# Altium PCB TPS60400.PcbDoc
Units mm, origin at the board's own origin, x right, y up, seen from the top; angles counter-clockwise.
Board outline 25.4 x 25.4 mm, 2 copper layers (Top Layer, Bottom Layer); 20 components, 12 nets, 61 pads, 12 vias.
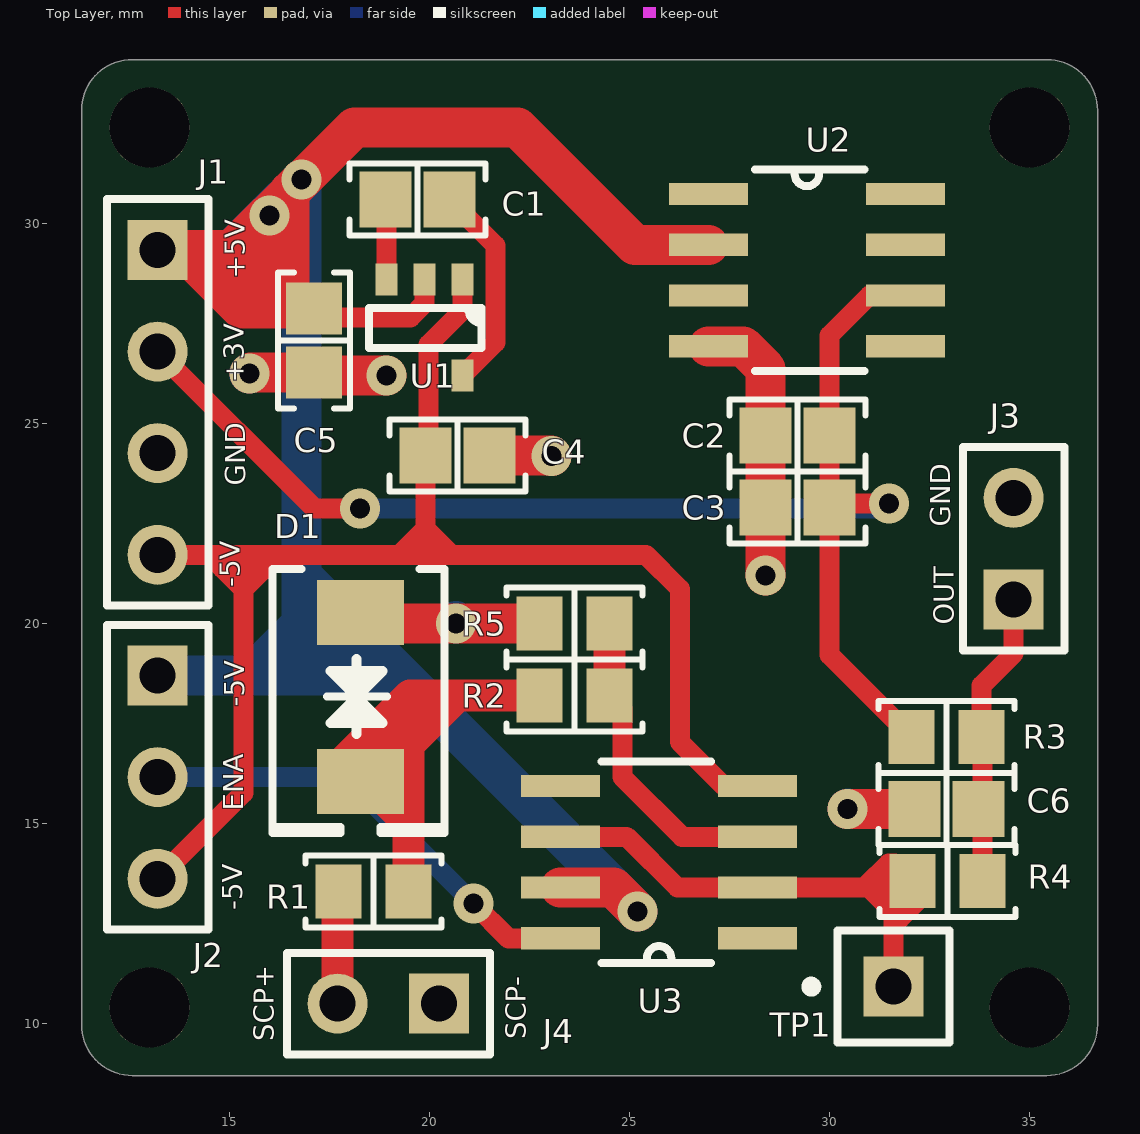
[diagram p0: Top Layer view]
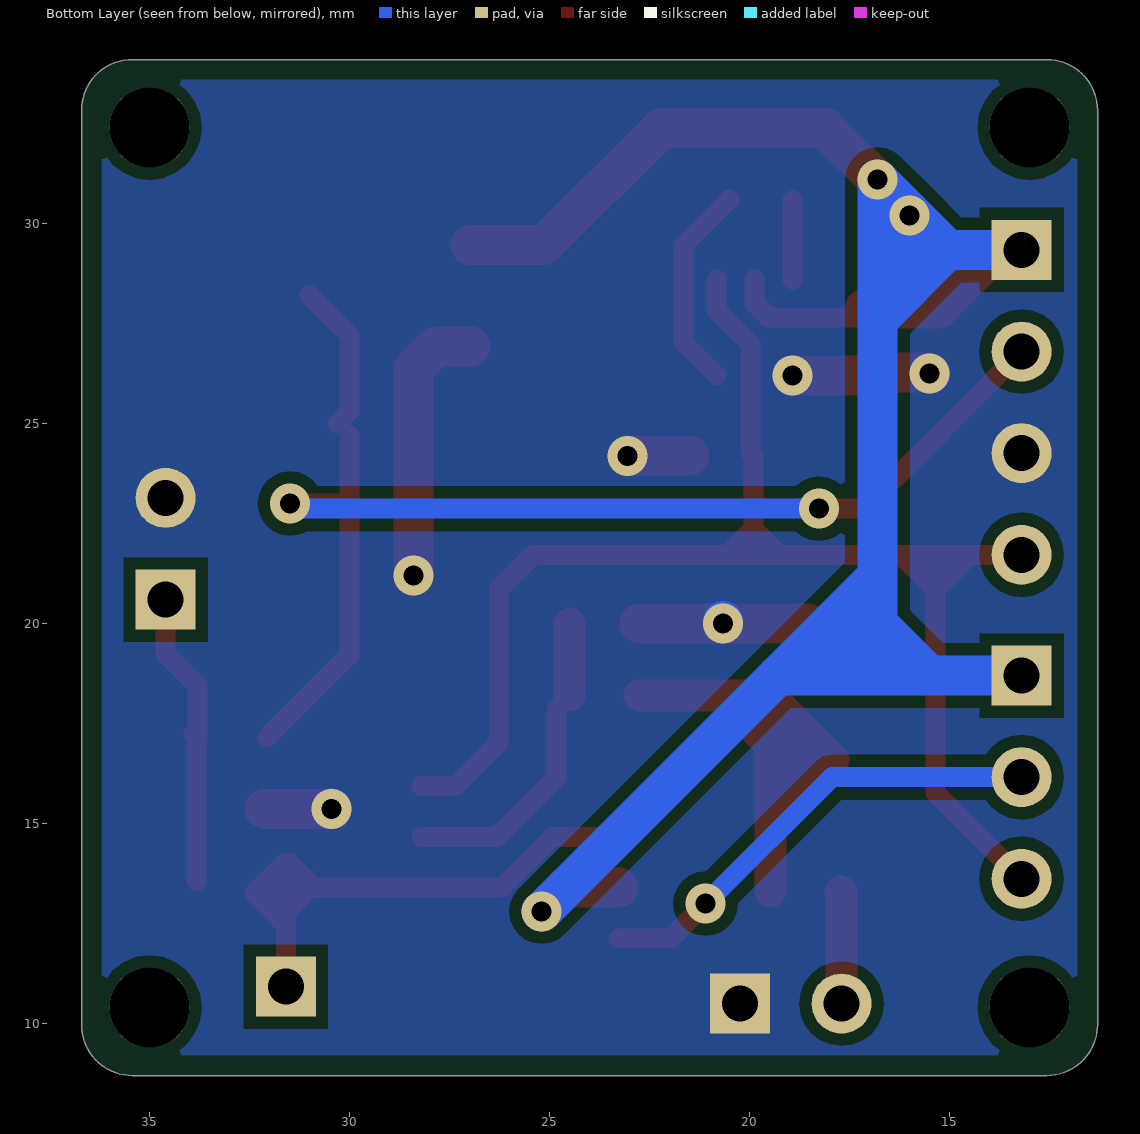
[diagram p1: Bottom Layer view, seen from below]
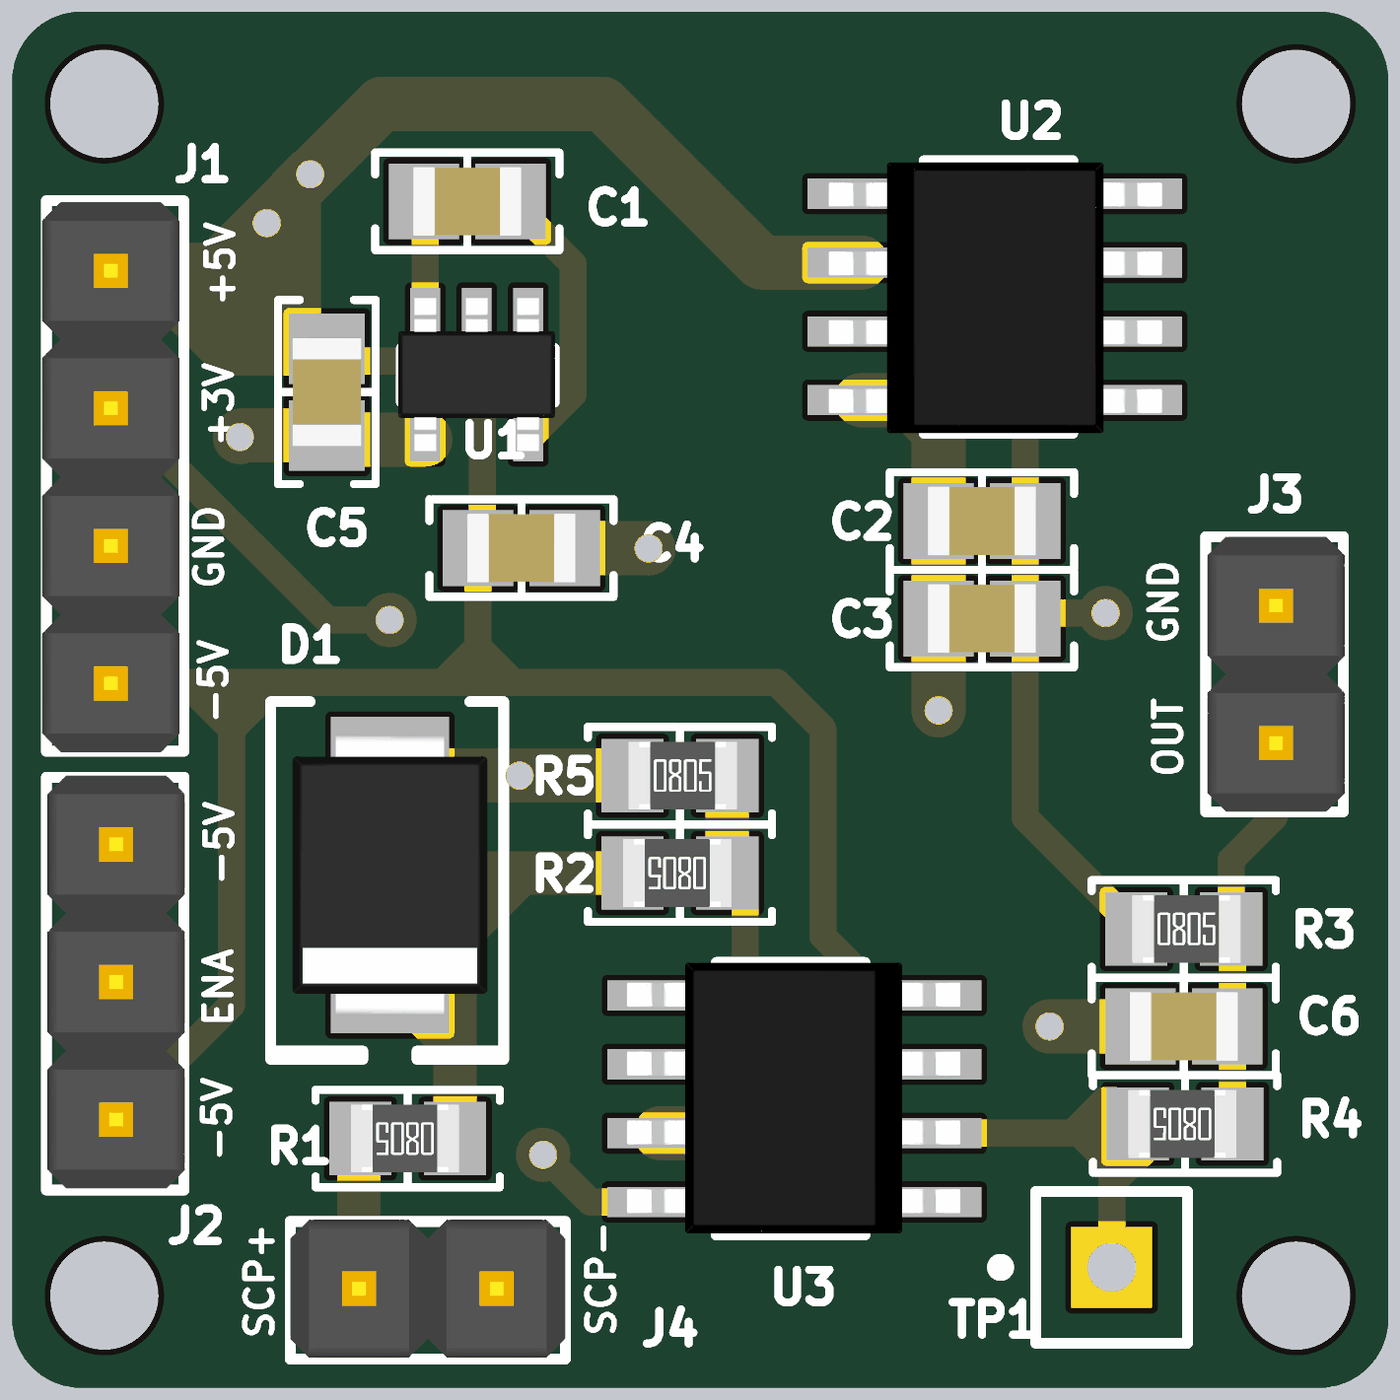
[diagram p2: 3D render of the assembled board from above, using the file's embedded part models]

## Layer stack, top to bottom
Top Solder: solder mask 0.0102, Solder Resist, Dk 3.5
Top Layer: signal copper 0.0356
Dielectric 1: dielectric 0.32, FR-4, Dk 4.8
Bottom Layer: signal copper 0.0356
Bottom Solder: solder mask 0.0102, Solder Resist, Dk 3.5

## Board outline
11.3,9.97 11.3,32.83 cw(c12.57,32.83) 12.57,34.1 35.43,34.1 cw(c35.43,32.83) 36.7,32.83 36.7,9.97 cw(c35.43,9.97) 35.43,8.7 12.57,8.7 cw(c12.57,9.97)

## Design rules (kind name [scope] priority, off if disabled: settings)
BoardOutlineClearance [All] p1: gap=0.254 ignorepadtopadclearanceinfootprint=FALSE except(0: Arc-SplitContinuation Track-SplitContinuation SMDPad-SplitContinuation THPad-SplitContinuation Via-SplitContinuation Fill-SplitContinuation Poly-SplitContinuation Region-SplitContinuation Text-SplitContinuation; 0.5: Poly-OutlineEdge)
Clearance PowerPlane [InNamedPolygon('PowerPlane')] p1: gap=0.3 ignorepadtopadclearanceinfootprint=TRUE
Clearance [All] p2: gap=0.3 ignorepadtopadclearanceinfootprint=TRUE
PolygonConnect PolygonConnect_1 [All vs IsNamedPolygon('PowerPlane')] p1: connectstyle=Direct reliefconductorwidth=0.254 reliefentries=4 polygonreliefangle="90 Angle" airgapwidth=0.254
PolygonConnect [All] p2: connectstyle=Relief reliefconductorwidth=0.254 reliefentries=4 polygonreliefangle="90 Angle" airgapwidth=0.254
RoutingVias [All] p1: holewidth=0.5 width=1 viastyle="Through Hole" minholewidth=0.1 minwidth=0.2 maxholewidth=5 maxwidth=6
SolderMaskExpansion [All] p1: expansion=0.102
Width [All] p1: maxlimit=10 minlimit=0.1 preferedwidth=0.5
30 further rules are at their usual default settings.

## Classes and differential pairs
component class TPS60400: C1 C2 C3 C4 C6 J1 J2 J3 J4 R1 R2 R3 R4 R5 TP1 U1 U2 U3

## Components (designator, comment, footprint, x,y, rotation, side; value= is the part's Value field where it differs from the comment)
C1 "1uF" "CAP 0805/2012" 19.7,30.6 r180 top
C2 "1uF" "CAP 0805/2012" 29.2,24.7 r0 top
C3 "1nF" "CAP 0805/2012" 29.2,22.9 r0 top
C4 "1uF" "CAP 0805/2012" 20.7,24.2 r180 top
C5 "1uF" "CAP 0805/2012" 17.108,27.08 r90 top
C6 "20pF" "CAP 0805/2012" 32.925,15.37 r0 top
D1 "SMBJ24CA" "ST DO214AA SMB" 18.272,18.164 r270 top
J1 "Pin Header Male ( 4 pin )" "PIN HEADER MALE ( 4 PIN )" 13.2,29.34 r270 top
J2 "Pin Header Male ( 3 pin )" "PIN HEADER MALE ( 3 PIN )" 13.2,18.7 r270 top
J3 "Pin Header Male ( 2 pin )" "PIN HEADER MALE ( 2 PIN )" 34.6,20.6 r90 top
J4 "Pin Header Male ( 2 pin )" "PIN HEADER MALE ( 2 PIN )" 20.24,10.5 r180 top
R1 "20k" "RES 0805/2012" 18.6,13.3 r180 top
R2 "680k" "RES 0805/2012" 23.625,18.2 r180 top
R3 "3k" "RES 0805/2012" 32.925,17.17 r0 top
R4 "3k" "RES 0805/2012" 32.95,13.57 r180 top
R5 "100k" "RES 0805/2012" 23.625,20 r0 top
TP1 "Socket" PIN1 31.594,10.922 r90 top
U1 "TPS60400" SOT-23-5 19.874,27.404 r270 top
U2 "REF5030" "SOIC-8 (150MIL-3.9MM WIDTH)" 25.972,29.395 r0 top
U3 "OPA734" "SOIC-8 (150MIL-3.9MM WIDTH)" 29.2,13.475 r180 top

## Footprints (in the part's own frame and the unit in brackets; to place one, negate y for a bottom-side part, rotate by r counter-clockwise, add the part's x,y. Pads: shape width x height; smd on the part's side, far side on the other; paste and mask are expansions set on the pad)
"CAP 0805/2012" [mm] "Chip Capacitor, 2-Leads, Body 2.00x1.20mm, IPC Medium Density"
  rect 1.3x1.4 smd: 1(-0.8,0) 2(0.8,0)
  silkscreen extent -1.7,-0.9 1.7,0.9, body extent -1,-0.64 1,0.64, height 1.26
PIN1 [mm] "Connector; Plug"
  rect 1.5x1.5 hole 0.9: 1(0,0)
  silkscreen extent -1.4,-1.4 1.4,2.17
"PIN HEADER MALE ( 2 PIN )" [mm]
  rect 1.5x1.5 hole 0.9: 1(0,0)
  round 1.5 hole 0.9: 2(2.54,0)
  silkscreen extent -1.27,-1.27 3.81,1.27, body extent -1.27,-1.3 3.81,1.24, height 9.5
"PIN HEADER MALE ( 3 PIN )" [mm]
  rect 1.5x1.5 hole 0.9: 1(0,0)
  round 1.5 hole 0.9: 2(2.54,0) 3(5.08,0)
  silkscreen extent -1.27,-1.27 6.35,1.27, body extent -1.3,-1.25 6.32,1.29, height 9.5
"PIN HEADER MALE ( 4 PIN )" [mm]
  rect 1.5x1.5 hole 0.9: 1(0,0)
  round 1.5 hole 0.9: 2(2.54,0) 3(5.08,0) 4(7.62,0)
  silkscreen extent -1.27,-1.27 8.89,1.27, body extent -1.25,-1.35 8.91,1.19, height 9.5
"RES 0805/2012" [mm] "Chip Resistor, 2-Leads, Body 2.00x1.25mm, IPC Medium Density"
  rect 1.15x1.35 smd: 1(-0.875,0) 2(0.875,0)
  silkscreen extent -1.7,-0.9 1.7,0.9, body extent -0.95,-0.62 1.05,0.63, height 0.6
"SOIC-8 (150MIL-3.9MM WIDTH)" [mil]
  rect 78x22 smd: 1(39.37,52.95) 2(39.37,2.95) 3(39.37,-47.05) 4(39.37,-97.05) 5(233.37,-97.05) 6(233.37,-47.05) 7(233.37,2.95) 8(233.37,52.95)
  silkscreen extent 85,-121 193,77, body extent 15,-121 258,76, height 79
SOT-23-5 [mm] "SOT23, 5-Leads, Body 3.00x2.85mm, Pitch 0.95mm, IPC Medium Density"
  rect 0.8x0.55 smd: 1(-1.2,0.95) 2(-1.2,0) 3(-1.2,-0.95) 4(1.2,-0.95) 5(1.2,0.95)
  silkscreen extent -0.48,-1.39 0.51,1.43, body extent -1.41,-1.45 1.41,1.45, height 1.5
"ST DO214AA SMB" [mm] "Molded Diode, 2-Leads, Body 4.31x3.62mm, IPC Medium Density"
  rect 1.62x2.18 smd: 1(-2.11,0) 2(2.11,0)
  silkscreen extent -3.2,-2.2 3.4,2.1, body extent -2.6,-1.8 2.6,1.8, height 2.4

## Part data
C1 C2 C3 C4 C5 C6: library part "CAP 0805/2012"
D1: library part ESD05V88D-LC, "DIODE SCHOTTKY 40V 2A DO214AA"
R1 R2 R3 R4 R5: library part "RES 0805/2012 ( 1/8W )"
U1: "IC REG SWTCHD CAP INV 60MA SOT23"
U2: "Series Voltage Reference IC ±0.1% 10mA"
U3: "IC OPAMP CHOPPER 1.6MHZ 8SOIC"
TP1: LatestRevisionDate=17-Jul-2002, LatestRevisionNote="Re-released for DXP Platform.", Publisher="Altium Limited"

## Free pads (board coordinates)
  round 2 hole 2 unplated: 1(13,32.4) 2(35,32.4) 3(35,10.4) 4(13,10.4)

## Via types
v1: diameter 1, hole 0.5, Top Layer to Bottom Layer, tented both sides, 12 vias

## Nets (pads, with @x,y where several pads share a name; then routed paths per layer and width w, separated by ;. In a path a pad name is that pad's centre, name@x,y a point inside that pad or via, vN(x,y) a via of type N, cw(c..) or ccw(c..) an arc to the next point about the centre after c; other vN are vias at no path point)
+3V: C2.2 C3.2 J1.2 R3.1 U2.6 | length 33.6
  Top Layer w0.5: J1.2 17.128,22.872 v1(18.266,22.872) ; C2.2 C3.2 ; C2.2@30.3,25 30,25.3 30,27.2 U2.6@31,28.2 ; v1(31.484,23) 30.122,23 30.011,22.889 C3.2 ; R3.1 30,19.22 C3.2
  Bottom Layer w0.5: v1(18.266,22.872) 31.356,22.872 v1(31.484,23)
+5V: C5.2 J1.1 J2.1 U1.2 U2.2 U3.7 | length 78.1
  Top Layer w0.5: C5.2@16.5,27.9 16.52,27.88 16.746,27.654 19.523,27.654 19.874,28.005 U1.2
  Top Layer w1: J1.1 J1.1@13.821,29.34 ; v1@16.5,30.8 v1(16.8,31.1) ; C5.2 16.52,27.88 15.281,27.88 J1.1@13.821,29.34 ; U3.7 24.6,13.4 v1(25.2,12.8) ; U2.2 25.13,29.47 22.2,32.4 18.12,32.4 v1@16.5,30.78 ; J1.1@13.821,29.34 15.06,29.34 ; 15.06,29.34 15.46,29.74 ; 15.06,29.34 16.5,27.9 16.5,28.8 ; 15.46,29.74 15.56,29.74 16.5,28.8 ; 15.46,29.74 v1@16.5,30.78 ; 16.5,28.8 v1@16.5,30.78
  Bottom Layer w1: J2.1 15.5,18.7 ; J1.1 15.04,29.34 ; 16.74,29.34 16.16,29.34 ; v1(25.2,12.8) 19.3,18.7 ; 15.04,29.34 16.78,27.6 16.8,27.6 ; 15.04,29.34 v1@15.92,30.22 ; 15.04,29.34 16.16,29.34 ; 15.5,18.7 16.1,18.7 ; 15.5,18.7 16.8,20 ; v1@15.92,30.22 15.92,29.58 16.16,29.34 ; v1@15.92,30.22 v1(16.8,31.1) 16.8,28.7 ; 16.1,18.7 18.1,18.7 ; 16.1,18.7 16.8,19.4 16.8,20 ; 16.16,29.34 16.8,28.7 ; 16.8,20 16.8,21.2 ; 16.8,20 18.1,18.7 ; 16.8,21.2 16.803,21.203 16.803,27.597 16.8,27.6 ; 16.8,21.2 19.3,18.7 ; 16.8,27.6 16.8,28.7 ; 18.1,18.7 19.3,18.7
  other v1: 16,30.2
-5V: C4.2 J1.4 J2.3 U1.1 U3.4 | length 39.9
  Top Layer w0.5: J2.3 15.35,15.77 15.35,20.852 ; J1.4 14.527,21.72 ; 15.429,21.378 14.823,21.378 ; 20.55,21.72 19.9,22.37 ; U1.1 20.824,27.824 19.974,26.974 19.974,24.274 C4.2 19.9,22.37 ; U3.4 27.358,15.94 26.262,17.036 26.262,20.864 25.406,21.72 19.832,21.72 ; 14.527,21.72 16.218,21.72 ; 14.527,21.72 14.527,21.675 14.823,21.378 ; 14.823,21.378 15.35,20.852 ; 15.35,20.852 16.218,21.72 ; 16.218,21.72 19.25,21.72 ; 19.25,21.72 19.832,21.72 ; 19.25,21.72 19.9,22.37 ; 19.832,21.72 19.9,21.788 19.9,22.37
ENA: J2.2 U3.8 | length 11.7
  Top Layer w0.5: v1(21.1,13) 21.97,12.13 U3.8
  Bottom Layer w0.5: J2.2 17.94,16.16 v1(21.1,13)
GND: C2.1 C3.1 C4.1 C5.1 C6.1 D1.1 J1.3 J3.2 J4.1 R5.1 U1.4 U2.4 | length 17.8
  Top Layer w1: v1(15.503,26.249) 15.528,26.274 15.534,26.28 C5.1 17.184,26.204 v1(18.924,26.204) ; D1.1@18.546,20 v1(20.665,20) R5.1 ; C4.1 23.039,24.2 v1(23.046,24.193) ; U2.4 27.837,26.93 28.4,26.367 C2.1 C3.1 v1(28.4,21.204) ; v1(30.449,15.37) C6.1
  Bottom Layer w1: v1@15.491,26.249 v1(15.503,26.249) ; v1(20.665,20) v1@20.665,20.064 ; v1(30.449,15.37) v1@30.456,15.377
NetC1_1: C1.1 U1.5 | length 5.2
  Top Layer w0.5: C1.1 21.649,29.451 21.649,27.029 U1.5
NetC1_2: C1.2 U1.3 | length 2
  Top Layer w0.5: U1.3 C1.2@18.924,30.576
NetD1_2: D1.2 R1.1 R2.2 | length 16.9
  Top Layer w0.8: R1.1 19.475,15.015 ; R2.2 20.7,18.2 ; D1.2@17.9,16.59 18.285,16.975 ; D1.2@17.9,16.59 19.475,15.015 ; D1.2@17.9,16.59 D1.2@18.885,16.59 ; 18.285,16.975 19.51,18.2 20.7,18.2 ; 18.285,16.975 19.475,16.975 ; D1.2@18.885,16.59 19.09,16.59 19.475,16.975 ; D1.2@18.885,16.59 19.475,16 ; 19.475,15.015 19.475,16 ; 19.475,16 19.475,16.975 ; 19.475,16.975 20.7,18.2
NetJ4_2: J4.2 R1.2 | length 2.8
  Top Layer w0.8: J4.2 17.7,13.275 R1.2
NetR2_1: R2.1 R5.2 U3.3 | length 8
  Top Layer w0.5: R2.1 24.826,17.874 24.826,16.16 26.316,14.67 U3.3
  Top Layer w0.8: R2.1 R5.2
NetR4_2: R4.2 TP1.1 U3.2 U3.6 | length 16.9
  Top Layer w0.5: U3.6 24.929,14.67 26.199,13.4 U3.2 30.87,13.4 30.929,13.459 ; TP1.1 31.594,12.463 ; 31.76,12.629 31.594,12.795 ; 30.929,13.459 31.594,12.795 ; 30.929,13.459 31.224,13.459 ; 30.929,13.459 31.474,14.004 31.641,14.004 R4.2 ; 31.224,13.459 R4.2@31.594,13.089 ; 31.224,13.459 R4.2@31.965,13.459 ; 31.594,12.463 32.388,13.257 R4.2 ; 31.594,12.463 31.594,12.795 ; 31.594,12.795 R4.2@31.594,13.089 ; R4.2@31.594,13.089 R4.2@31.965,13.459 ; R4.2@31.965,13.459 R4.2
VOUT: C6.2 J3.1 R3.2 R4.1 | length 7.6
  Top Layer w0.5: R3.2 R3.2@33.8,17.245 ; R4.1 R3.2@33.825,17.27 ; R3.2@33.9,17.27 R3.2@33.825,17.27 ; J3.1 34.6,19.248 33.8,18.448 R3.2@33.8,17.245 ; R3.2@33.8,17.245 R3.2@33.825,17.27
pads on no net: U2.1 U2.3 U2.5 U2.7 U2.8 U3.1 U3.5

## Polygon pours and split planes (outlines as drawn)
GND on Bottom Layer "PowerPlane" (solid, pour order 1): 11.3,9.97 11.3,32.83 cw(c12.57,32.83) 12.57,34.1 35.43,34.1 cw(c35.43,32.83) 36.7,32.83 36.7,9.97 cw(c35.43,9.97) 35.43,8.7 12.57,8.7 cw(c12.57,9.97)

## Other copper
Top Layer:
  rectangle net NetD1_2: 19,16.9 19.9,17.9

## Silkscreen, mask and mechanical layers (free items; w line width, h text height)
Top Overlay:
  text "+5V" at 15.379,28.618 h0.5 r90
  text "+3V" at 15.349,26.022 h0.5 r90
  text "GND" at 15.396,23.442 h0.5 r90
  text "GND" at 33.014,22.426 h0.5 r90
  text "-5V" at 15.255,20.909 h0.5 r90
  text "OUT" at 33.099,19.974 h0.5 r90
  text "-5V" at 15.361,17.924 h0.5 r90
  text "ENA" at 15.34,15.323 h0.5 r90
  text "-5V" at 15.319,12.828 h0.5 r90
  text "SCP-" at 22.409,9.603 h0.5 r90
  text "SCP+" at 16.1,9.557 h0.5 r90
BoardOutline:
  lines w0.254: 11.3,9.97 ccw(c12.57,9.97) 12.57,8.7 24.762,8.7 35.43,8.7 ccw(c35.43,9.97) 36.7,9.97 36.7,22.67 36.7,32.83 ccw(c35.43,32.83) 35.43,34.1 16.126,34.1 12.57,34.1 ccw(c12.57,32.83) 11.3,32.83 11.3,16.32 11.3,9.97

## Dimensions
35.43,8.7 to 35.43,34.1 on Mechanical 16
11.3,32.83 to 36.7,32.83 on Mechanical 16